# EAGLE board CT_schematic (EAGLE 7.6.0)

Size 100 x 80 mm. Coordinates in mm from the lower left corner, seen from the top.
Outline: 0,0 100,0 100,80 0,80 0,0
Copper layers (1*16): Top 0.035mm / dielectric 1.5mm / Bottom 0.035mm
Design rules "default": minimum track width 10mil, minimum drill 24mil, track to track 8mil, track to pad 8mil, pad to pad 8mil, via to via 8mil, smd to smd 8mil, copper to edge 40mil, drill to drill 8mil, minimum pad ring 10mil, minimum via ring 8mil, stop-mask expansion 4mil, vias tented up to drill 0mil, thermal gap 10mil

## Footprints (pad centres in the part's own frame; a part is rotated, then mirrored left to right if it is on the bottom)
C0603 = smd 0.8 x 0.8: 1 -0.762,0; 2 0.762,0
C0402 = smd 0.5 x 0.5: 1 -0.508,0; 2 0.508,0
C1206 = smd 1.3 x 1.6: 1 -1.524,0; 2 1.524,0
C0805 = smd 1.2 x 1.3: 1 -1.016,0; 2 1.016,0
EXV-9B = smd 2.718 x 1.778: 1 -2.108,0; 2 2.108,0
EXV-9H = smd 3.505 x 1.676: 1 -2.857,0; 2 2.857,0
L0603 = smd 0.8 x 0.8: 1 -0.762,0; 2 0.762,0
PJ-037B_PACKAGE = drill 3.7 square: 1 12,0 | drill 3.2 square: 2 6,0
R0603 = smd 0.8 x 0.8: 1 -0.762,0; 2 0.762,0
LQFP48 = smd 0.3 x 1.2: 1 -2.75,-4.25; 2 -2.25,-4.25; 3 -1.75,-4.25; 4 -1.25,-4.25; 5 -0.75,-4.25; 6 -0.25,-4.25; 7 0.25,-4.25; 8 0.75,-4.25; 9 1.25,-4.25; 10 1.75,-4.25; 11 2.25,-4.25; 12 2.75,-4.25; 25 2.75,4.25; 26 2.25,4.25; 27 1.75,4.25; 28 1.25,4.25; 29 0.75,4.25; 30 0.25,4.25; 31 -0.25,4.25; 32 -0.75,4.25; 33 -1.25,4.25; 34 -1.75,4.25; 35 -2.25,4.25; 36 -2.75,4.25 | smd 1.2 x 0.3: 13 4.25,-2.75; 14 4.25,-2.25; 15 4.25,-1.75; 16 4.25,-1.25; 17 4.25,-0.75; 18 4.25,-0.25; 19 4.25,0.25; 20 4.25,0.75; 21 4.25,1.25; 22 4.25,1.75; 23 4.25,2.25; 24 4.25,2.75; 37 -4.25,2.75; 38 -4.25,2.25; 39 -4.25,1.75; 40 -4.25,1.25; 41 -4.25,0.75; 42 -4.25,0.25; 43 -4.25,-0.25; 44 -4.25,-0.75; 45 -4.25,-1.25; 46 -4.25,-1.75; 47 -4.25,-2.25; 48 -4.25,-2.75
SOIC-8 = smd 1.6 x 0.6: 1 -2.7,1.905 | smd 1.55 x 0.6: 2 -2.7,0.635; 3 -2.7,-0.635; 4 -2.7,-1.905; 5 2.7,-1.905; 6 2.7,-0.635; 7 2.7,0.635; 8 2.7,1.905
SOT-23-8 = smd 0.4 x 1.2: 1 -0.975,-1.3; 2 -0.325,-1.3; 3 0.325,-1.3; 4 0.975,-1.3; 5 0.975,1.3; 6 0.325,1.3; 7 -0.325,1.3; 8 -0.975,1.3
182-009-MALE = drill 1.194 pad 1.524 octagon: 1 -5.537,10.923; 2 -2.769,10.923; 3 0,10.923; 4 2.769,10.923; 5 5.537,10.923; 6 -4.153,8.08; 7 -1.384,8.08; 8 1.384,8.08; 9 4.153,8.08 | hole 3.048: -12.446,9.501; 12.446,9.501
TDFN-8/6MM = smd 0.3 x 0.75: 1 0,0; 2 0.5,0; 3 1,0; 4 1.5,0; 5 1.5,3; 6 1,3; 7 0.5,3; 8 0,3
QFN65P400X400X100-17N = smd 1.016 x 0.356: 1 -1.803,0.965; 2 -1.803,0.33; 3 -1.803,-0.33; 4 -1.803,-0.965; 9 1.803,-0.965; 10 1.803,-0.33; 11 1.803,0.33; 12 1.803,0.965 | smd 0.356 x 1.016: 5 -0.965,-1.803; 6 -0.33,-1.803; 7 0.33,-1.803; 8 0.965,-1.803; 13 0.965,1.803; 14 0.33,1.803; 15 -0.33,1.803; 16 -0.965,1.803 | smd 2.108 x 2.108: 17 0,0
HTSS-105-01-G-D = drill 1 pad 1.8 square: 1 0,0 | drill 1 pad 1.8: 2 0,2.54; 3 2.54,0; 4 2.54,2.54; 5 5.08,0; 6 5.08,2.54; 7 7.62,0; 8 7.62,2.54; 9 10.16,0; 10 10.16,2.54
ASEK = smd 1.4 x 1: 1 -1.1,-0.8; 2 1.1,-0.8; 3 1.1,0.8; 4 -1.1,0.8
ASDMB-XX.XXXXMHZ-XX-XX-XXX = smd 0.65 x 0.85: 1 0.45,0.2; 2 2.05,0.2; 3 2.05,1.8; 4 0.45,1.8
WSON-8 = smd 0.3 x 0.6: 1 -0.75,0; 2 0.05,0; 3 0.85,0; 4 1.65,0; 5 1.65,3.8; 6 0.85,3.8; 7 0.05,3.8; 8 -0.75,3.8 | smd 3 x 2.6: PAD 0.45,1.9
LP2954 = smd 1.6 x 0.6: 1 -2.475,1.905 | smd 1.55 x 0.6: 2 -2.475,0.635; 3 -2.475,-0.635; 4 -2.475,-1.905; 5 2.475,-1.905; 6 2.475,-0.635; 7 2.475,0.635; 8 2.475,1.905
SON-6 = smd 0.55 x 0.3: 1 -0.355,0.5 | smd 0.52 x 0.3: 2 -0.37,0; 3 -0.37,-0.5; 4 0.37,-0.5; 5 0.37,0; 6 0.37,0.5
SW_4-1437565-2 = smd 1.4 x 2.1: 1 -2.23,4.55; 2 -2.23,-4.55; 3 2.23,4.55; 4 2.23,-4.55
LGM67K-G1J2-24-Z = smd 0.8 x 1.4: A -2,0; C 0,0
NC7SZ125M5X = smd 1.3 x 0.7: 1 -1.3,0.95; 2 -1.3,0; 3 -1.3,-0.95; 4 1.3,-0.95; 5 1.3,0.95

## Placement (x,y rotation side)
C1  1e-06  [C0603]  -53.34,76.2 0 top  (outside the outline)
C2  1e-07  [C0603]  -57.15,76.2 0 top  (outside the outline)
C3  1e-07  [C0603]  -60.96,76.2 0 top  (outside the outline)
C4  1e-07  [C0603]  -64.77,76.2 0 top  (outside the outline)
C5  4.7e-06  [C0603]  -49.53,76.2 0 top  (outside the outline)
C6  1e-07  [C0603]  -68.58,76.2 0 top  (outside the outline)
C7  1e-07  [C0603]  -72.39,76.2 0 top  (outside the outline)
C8  1e-08  [C0603]  -76.2,76.2 0 top  (outside the outline)
C9  1e-06  [C0603]  -15.24,81.28 0 top  (outside the outline)
C10  1e-08  [C0402]  -57.15,81.28 0 top  (outside the outline)
C11  1e-07  [C0402]  -60.96,81.28 0 top  (outside the outline)
C12  1e-08  [C0402]  -64.77,81.28 0 top  (outside the outline)
C13  1e-07  [C0402]  -68.58,81.28 0 top  (outside the outline)
C14  1e-06  [C0603]  -19.05,81.28 0 top  (outside the outline)
C15  1e-08  [C0402]  -72.39,81.28 0 top  (outside the outline)
C16  1e-08  [C0402]  -76.2,81.28 0 top  (outside the outline)
C17  1e-08  [C0402]  -15.24,86.36 0 top  (outside the outline)
C18  1e-05  [C1206]  -50.8,62.23 0 top  (outside the outline)
C19  1e-05  [C0805]  -21.59,69.85 0 top  (outside the outline)
C20  1e-06  [EXV-9B]  -62.23,62.23 0 top  (outside the outline)
C21  2.2e-06  [EXV-9B]  -71.12,62.23 0 top  (outside the outline)
C22  1e-07  [C0402]  -19.05,86.36 0 top  (outside the outline)
C23  0.0001  [EXV-9H]  -17.78,63.5 0 top  (outside the outline)
C24  0.0001  [EXV-9H]  -29.21,63.5 0 top  (outside the outline)
C25  1e-08  [C0402]  -22.86,86.36 0 top  (outside the outline)
F1  240.0  [L0603]  -22.86,81.28 0 top  (outside the outline)
J1  PJ-037B  [PJ-037B_PACKAGE]  -54.61,29.21 0 top  (outside the outline)
R1  10000.0  [R0603]  -62.23,69.85 0 top  (outside the outline)
R2  1000.0  [R0603]  -26.67,81.28 0 top  (outside the outline)
R3  910.0  [R0603]  -30.48,81.28 0 top  (outside the outline)
R4  4700.0  [R0603]  -34.29,81.28 0 top  (outside the outline)
R5  2200.0  [R0603]  -38.1,81.28 0 top  (outside the outline)
R6  2200.0  [R0603]  -41.91,81.28 0 top  (outside the outline)
R7  10000.0  [R0603]  -67.31,69.85 0 top  (outside the outline)
R8  10000.0  [R0603]  -72.39,69.85 0 top  (outside the outline)
R9  10000.0  [R0603]  -77.47,69.85 0 top  (outside the outline)
R10  10000.0  [R0603]  -15.24,76.2 0 top  (outside the outline)
R11  10000.0  [R0603]  -20.32,76.2 0 top  (outside the outline)
R12  120.0  [R0603]  -45.72,81.28 0 top  (outside the outline)
R13  10000.0  [R0603]  -25.4,76.2 0 top  (outside the outline)
R14  10000.0  [R0603]  -30.48,76.2 0 top  (outside the outline)
R15  100000.0  [R0603]  -31.75,69.85 0 top  (outside the outline)
R16  806.0  [R0603]  -49.53,81.28 0 top  (outside the outline)
R17  1000.0  [R0603]  -53.34,81.28 0 top  (outside the outline)
R18  100000.0  [R0603]  -36.83,69.85 0 top  (outside the outline)
R19  100000.0  [R0603]  -41.91,69.85 0 top  (outside the outline)
R20  164658.62  [R0603]  -26.67,69.85 0 top  (outside the outline)
R21  100000.0  [R0603]  -46.99,69.85 0 top  (outside the outline)
R22  10000.0  [R0603]  -35.56,76.2 0 top  (outside the outline)
R23  10000.0  [R0603]  -40.64,76.2 0 top  (outside the outline)
R24  82000.0  [R0603]  -45.72,76.2 0 top  (outside the outline)
R25  300000.0  [R0603]  -52.07,69.85 0 top  (outside the outline)
R26  120000.0  [R0603]  -57.15,69.85 0 top  (outside the outline)
U1  stm32f098cct7  [LQFP48]  -22.86,44.45 0 top  (outside the outline)
U2  AT25M01-SSHM-T  [SOIC-8]  -24.13,54.61 0 top  (outside the outline)
U3  MAX3051EKA+T  [SOT-23-8]  -55.88,62.23 0 top  (outside the outline)
U4  182-009-113R531  [182-009-MALE]  -41.91,6.35 0 top  (outside the outline)
U5  24AA00T-I/MNY  [TDFN-8/6MM]  -58.42,41.91 0 top  (outside the outline)
U6  TSC2008TRGVRQ1  [QFN65P400X400X100-17N]  -35.56,30.48 0 top  (outside the outline)
U7  HTSS-105-01-G-D  [HTSS-105-01-G-D]  -43.18,41.91 0 top  (outside the outline)
U8  ASEK-2-32.768KHz-ECST  [ASEK]  -67.31,53.34 0 top  (outside the outline)
U9  ASDMB-25.000MHZ-EC-T  [ASDMB-XX.XXXXMHZ-XX-XX-XXX]  -16.51,1.27 0 top  (outside the outline)
U10  LP3878SDX-ADJ/NOPB  [WSON-8]  -45.72,52.07 0 top  (outside the outline)
U11  LP2954AIMX/NOPB  [LP2954]  -73.66,43.18 0 top  (outside the outline)
U12  TPS3895ADRYR  [SON-6]  -25.4,85.09 0 top  (outside the outline)
U13  4-1437565-2  [SW_4-1437565-2]  -71.12,27.94 0 top  (outside the outline)
U14  Q65110A2395  [LGM67K-G1J2-24-Z]  -39.37,62.23 0 top  (outside the outline)
U15  nc7sz125m5x  [NC7SZ125M5X]  -15.24,69.85 0 top  (outside the outline)

## Library data of the parts
C1-C25 F1 J1 R1-R26 U1-U15 = circuit_tree

## Nets
CLK_U1_3: U1.3 U8.3
CLK_U1_5: U1.5 U9.3
GND: C1.2 C2.2 C3.2 C4.2 C5.2 C6.2 C7.2 C8.2 C9.2 C10.2 C11.2 C12.2 C13.2 C14.2 C15.2 C16.2 C17.2 C18.2 C19.2 C20.2 C21.2 C22.2 C23.2 C24.2 C25.2 J1.2 R2.2 R7.2 R8.2 R17.2 R21.2 R24.2 R26.2 U1.8 U1.23 U1.35 U1.47 U2.4 U3.2 U3.8 U4.5 U5.4 U6.10 U6.12 U6.17 U7.9 U8.2 U9.2 U10.3 U10.PAD U11.4 U12.2 U14.C U15.1 U15.3
NET_U1_6: R5.1 U1.6 U5.6
NET_U1_7: R4.1 U1.7 U15.4
NET_U1_9: C8.1 C9.1 F1.1 U1.9
NET_U1_20: R8.1 U1.20
NET_U1_31: R6.1 U1.31 U5.5
NET_U1_44: R7.1 U1.44
NET_U1_45: R3.1 U1.45 U14.A
NET_U1_46: R1.1 U1.46 U13.3 U13.4
NET_U2_3: R9.1 U2.3
NET_U2_7: R11.1 U2.7
NET_U3_6: R12.2 U3.6
NET_U4_2: R12.2 U3.6 U4.2
NET_U4_3: R12.1 U3.7 U4.3
NET_U6_15: R14.1 U6.15
NET_U7_3: U6.7 U7.3
NET_U7_4: U6.9 U7.4
NET_U7_5: U6.6 U7.5
NET_U7_6: U6.8 U7.6
NET_U10_1: C17.1 U10.1
NET_U10_6: R16.2 R17.1 U10.6
NET_U10_8: R15.1 U10.8
NET_U11_3: R19.1 U11.3
NET_U11_5: R18.1 U11.5
NET_U11_7: R20.2 R21.1 U11.7
NET_U12_1: R23.1 R24.1 U12.1
NET_U12_3: R25.2 R26.1 U12.3
NET_U12_4: R22.1 U12.4 U15.2
NET_U13_1: R2.1 U13.1 U13.2
PROC_CAN_RX: U1.32 U3.4
PROC_CAN_TX: U1.33 U3.1
PROC_SPI1_MISO: U1.16 U6.16
PROC_SPI1_MOSI: U1.17 U6.2
PROC_SPI1_NSS: R13.1 U1.14 U6.3
PROC_SPI1_SCK: U1.15 U6.4
PROC_SPI2_MISO: U1.27 U2.2
PROC_SPI2_MOSI: U1.28 U2.5
PROC_SPI2_NSS: R10.1 U1.25 U2.1
PROC_SPI2_SCK: U1.21 U2.6
VCC_S1_7V4: C18.1 C20.1 C23.1 C24.1 J1.1 R15.2 R19.2 U10.4 U11.8
VCC_TIER1_1V8: C1.1 C2.1 C3.1 C4.1 C5.1 C6.1 C10.1 C12.1 C13.1 C14.1 C15.1 C16.1 C19.1 C22.1 C25.1 F1.2 R1.2 R3.2 R4.2 R5.2 R9.2 R10.2 R11.2 R13.2 R14.2 R16.1 R22.2 R23.2 R25.1 U1.1 U1.24 U1.48 U2.8 U5.8 U6.5 U8.4 U9.4 U10.5 U12.6 U15.5
VCC_TIER1_3V3: C7.1 C11.1 C21.1 R6.2 R18.2 R20.1 U1.36 U3.3 U11.1

## Tracks (layer width: path | path; a pad name or v marks a point on that pad's centre or on a via)
CLK_U1_3  (1 unrouted)
CLK_U1_5  (1 unrouted)
GND  (54 unrouted)
NET_U1_6  (2 unrouted)
NET_U1_7  (2 unrouted)
NET_U1_9  (3 unrouted)
NET_U1_20  (1 unrouted)
NET_U1_31  (2 unrouted)
NET_U1_44  (1 unrouted)
NET_U1_45  (2 unrouted)
NET_U1_46  (3 unrouted)
NET_U2_3  (1 unrouted)
NET_U2_7  (1 unrouted)
NET_U3_6  (1 unrouted)
NET_U4_2  (2 unrouted)
NET_U4_3  (2 unrouted)
NET_U6_15  (1 unrouted)
NET_U7_3  (1 unrouted)
NET_U7_4  (1 unrouted)
NET_U7_5  (1 unrouted)
NET_U7_6  (1 unrouted)
NET_U10_1  (1 unrouted)
NET_U10_6  (2 unrouted)
NET_U10_8  (1 unrouted)
NET_U11_3  (1 unrouted)
NET_U11_5  (1 unrouted)
NET_U11_7  (2 unrouted)
NET_U12_1  (2 unrouted)
NET_U12_3  (2 unrouted)
NET_U12_4  (2 unrouted)
NET_U13_1  (2 unrouted)
PROC_CAN_RX  (1 unrouted)
PROC_CAN_TX  (1 unrouted)
PROC_SPI1_MISO  (1 unrouted)
PROC_SPI1_MOSI  (1 unrouted)
PROC_SPI1_NSS  (2 unrouted)
PROC_SPI1_SCK  (1 unrouted)
PROC_SPI2_MISO  (1 unrouted)
PROC_SPI2_MOSI  (1 unrouted)
PROC_SPI2_NSS  (2 unrouted)
PROC_SPI2_SCK  (1 unrouted)
VCC_S1_7V4  (8 unrouted)
VCC_TIER1_1V8  (39 unrouted)
VCC_TIER1_3V3  (8 unrouted)